# Altium PCB S6-EXP-Bridge.PcbDoc
Units mm, origin at the board's own origin, x right, y up, seen from the top; angles counter-clockwise.
Board outline 18 x 43 mm, 2 copper layers (Top Layer, Bottom Layer), stack 1.621 mm thick; 4 components, 19 nets, 40 pads, 43 vias.
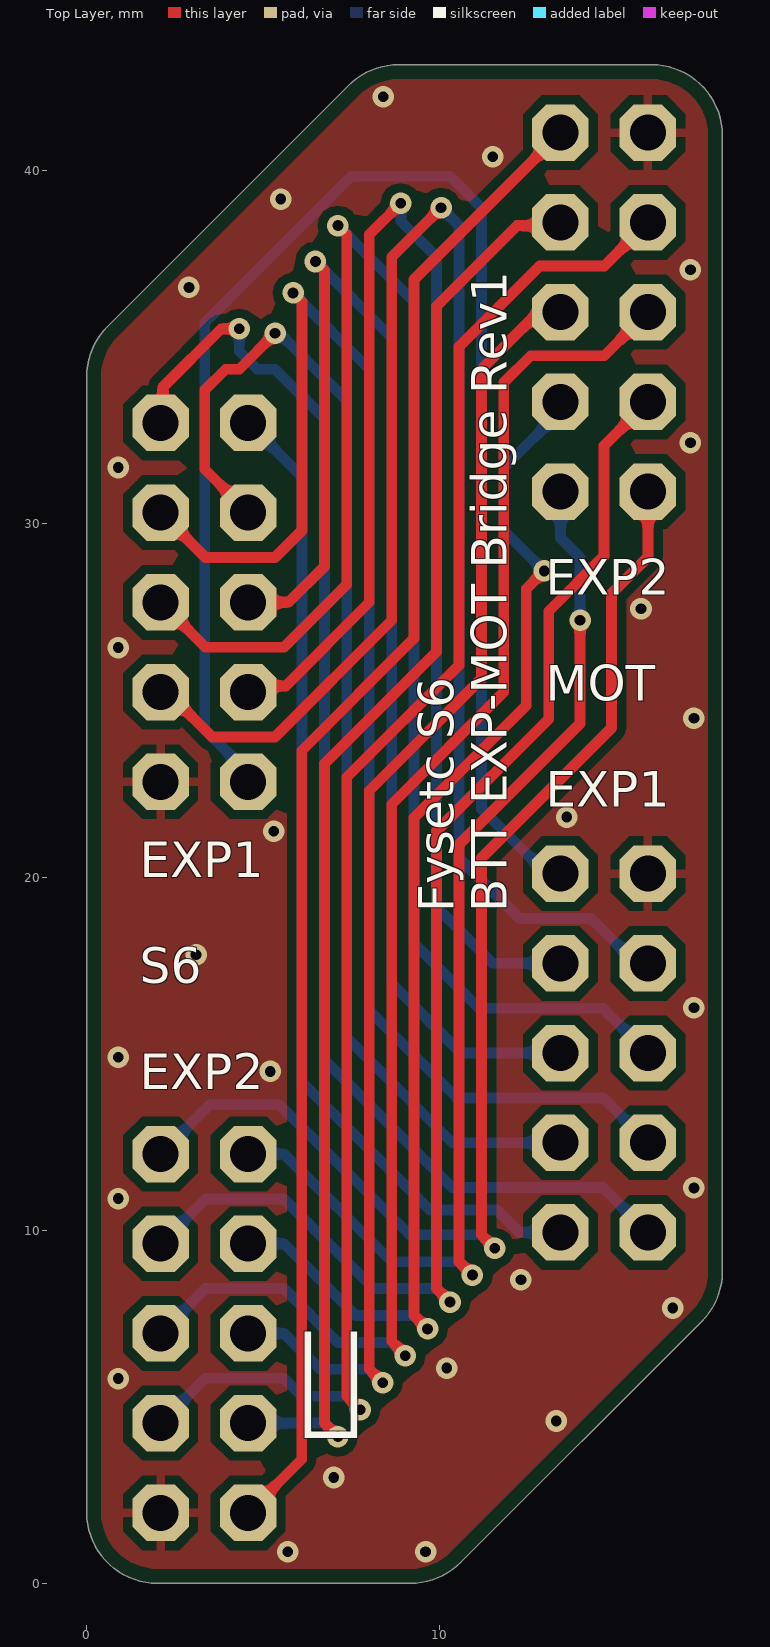
[diagram p0: Top Layer view]
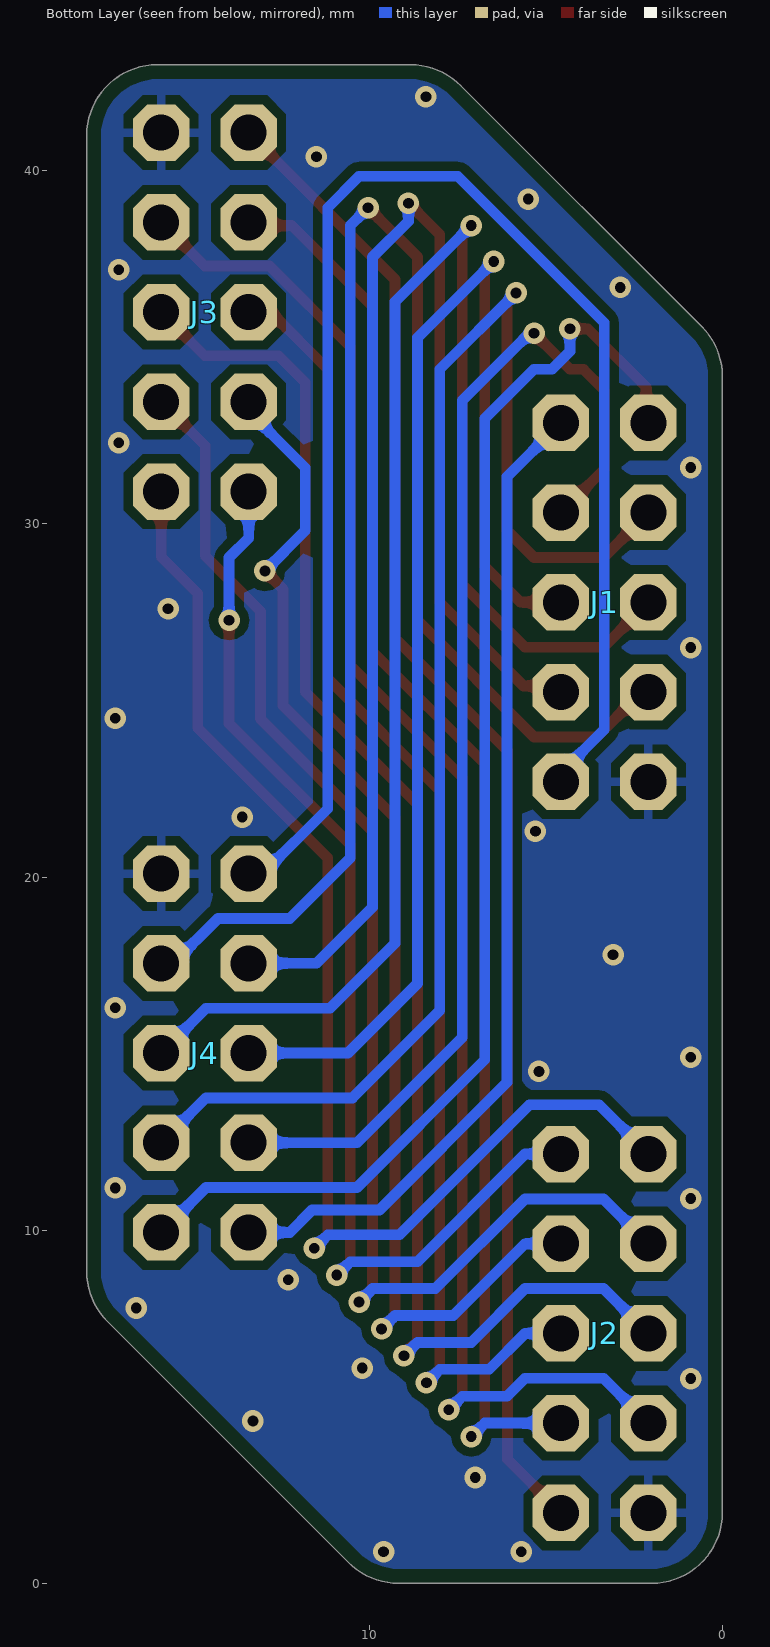
[diagram p1: Bottom Layer view, seen from below]
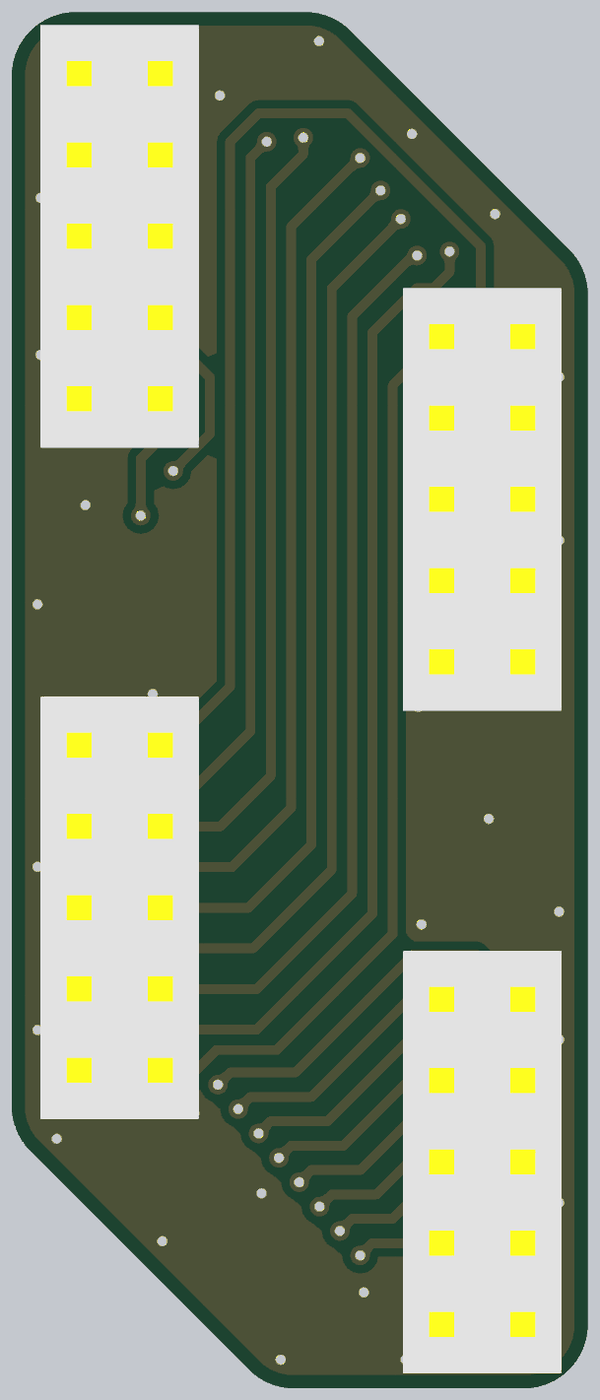
[diagram p2: 3D render of the assembled board from below, using the file's embedded part models]

## Layer stack, top to bottom
Top Solder: solder mask 0.0102, Solder Resist, Dk 3.5
Top Layer: signal copper 0.0356
Dielectric 1: dielectric 1.55, FR-4, Dk 4.8
Bottom Layer: signal copper 0.0356
Bottom Solder: solder mask 0.0102, Solder Resist, Dk 3.5

## Board outline
0.005,2.005 0.005,34.177 cw(c2.005,34.177) 0.591,35.591 7.419,42.419 cw(c8.833,41.005) 8.833,43.005 16.005,43.005 cw(c16.005,41.005) 18.005,41.005 18.005,8.833 cw(c16.005,8.833) 17.419,7.419 10.591,0.591 cw(c9.177,2.005) 9.177,0.005 2.005,0.005 cw(c2.005,2.005)

## Design rules (kind name [scope] priority, off if disabled: settings)
BoardOutlineClearance [All] p1: gap=0.406 ignorepadtopadclearanceinfootprint=FALSE except(0: Text-OutlineEdge)
Clearance Clearance_FiducialMark [(InComponentClass('FiducialMark')) and IsKeepOut vs (InComponentClass('FiducialMark'))] p1: gap=0.254 ignorepadtopadclearanceinfootprint=FALSE except(0: Arc-SMDPad Track-SMDPad)
Clearance [All] p2: gap=0.254 ignorepadtopadclearanceinfootprint=FALSE
HoleSize [All] p1: absolutevalues=TRUE maxlimit=6 minlimit=0.305 maxpercent=80.000 minpercent=20.000
MinimumAnnularRing [All] p1: minimumring=0.152
MinimumSolderMaskSliver [All] p1: minsoldermaskwidth=0.198
PolygonConnect [All] p1: thpad.connectstyle=Relief thpad.reliefconductorwidth=0.254 thpad.reliefentries=4 thpad.polygonreliefangle="90 Angle" thpad.airgapwidth=0.254 smdpad.connectstyle=Relief smdpad.reliefconductorwidth=0.254 smdpad.reliefentries=4 smdpad.polygonreliefangle="90 Angle" smdpad.airgapwidth=0.254 via.connectstyle=Direct via.reliefconductorwidth=0.254 via.reliefentries=4 via.polygonreliefangle="90 Angle" via.airgapwidth=0.254
RoomDefinition S6-EXP-Bridge [InComponentClass('S6-EXP-Bridge')] p1: confinementstyle=ConfineIn formatcopy=TRUE lockcomponents=FALSE outline 0,43 0,0 18,0 18,43
RoutingVias [All] p1: holewidth=0.711 width=1.27 viastyle="Through Hole" minholewidth=0.711 minwidth=1.27 maxholewidth=0.711 maxwidth=1.27
SilkToSolderMaskClearance [IsPad] p1: minsilkscreentomaskgap=0 clearancetoexposedcopper=TRUE
SolderMaskExpansion [All] p1: expansion=0.051
Width [All] p1: maxlimit=1.016 minlimit=0.305 preferedwidth=0.305 minimp=50.000000 maximp=50.000000 favimp=50.000000
27 further rules are at their usual default settings.

## Components (designator, comment, footprint, x,y, rotation, side; value= is the part's Value field where it differs from the comment)
J1 "SFH11-PBPC-D05-ST-BK" R2X5 3.307,27.781 r270 bottom
J2 "SFH11-PBPC-D05-ST-BK" R2X5 3.307,7.08 r270 bottom
J3 "SFH11-PBPC-D05-ST-BK" R2X5 14.627,36 r270 bottom
J4 "SFH11-PBPC-D05-ST-BK" R2X5 14.627,15.02 r270 bottom

## Footprints (in the part's own frame and the unit in brackets; to place one, negate y for a bottom-side part, rotate by r counter-clockwise, add the part's x,y. Pads: shape width x height; smd on the part's side, far side on the other; paste and mask are expansions set on the pad)
R2X5 [mm] "2x5 2.54mm Pin Receptacle"
  oct 1.6x1.6 hole 1.02: 1(5.08,-1.27) 2(5.08,1.207) 3(2.54,-1.27) 4(2.54,1.207) 5(0,-1.27) 6(0,1.207) 7(-2.54,-1.27) 8(-2.54,1.207) 9(-5.08,-1.27) 10(-5.08,1.207)
  body extent -6.6,-2.48 6.6,2.48, height 8.51

## Part data
J1 J2 J3 J4: library part R100_2x5, "2x5 2.54mm Pin Receptacle", Color=Black, Manufacturer 1=Sullins, Package Quantity=1, Supplier Part Number 1=S9194-ND, ComponentLink1Description=https://datasheet.ciiva.com/754/sfh11-pxxc-dxx-st-xx11160-c-754555.pdf?src-supplier=Digi-Key, ComponentLink1URL=https://datasheet.ciiva.com/754/sfh11-pxxc-dxx-st-xx11160-c-754555.pdf?src-supplier=Digi-Key, Connector Type=Header,Socket, Contact Plating=Gold, Lead Free="Lead Free", Manufacturer Part Number 1=SFH11-PBPC-D05-ST-BK, Mount="Through Hole", Number of Positions=10, Number of Rows=2, Packaging=Tray, Pitch=0.1inch, Pricing 1="1=0.66000, 10=0.57600, 100=0.49700, 500=0.40662, 1000=0.36144, 5000=0.32630 (USD)", RoHS=Yes, Row Spacing=0.1inch, Stock 1=22341, Supplier 1=Digi-Key, Termination=Solder

## Via types
v1: diameter 0.61, hole 0.305, Top Layer to Bottom Layer, tented both sides, 43 vias

## Nets (pads, with @x,y where several pads share a name; then routed paths per layer and width w, separated by ;. In a path a pad name is that pad's centre, name@x,y a point inside that pad or via, vN(x,y) a via of type N, cw(c..) or ccw(c..) an arc to the next point about the centre after c; other vN are vias at no path point)
E1-1: J1.1 J4.10 | length 43.8
  Top Layer w0.305: J1.1@4.577,22.32 J1.1 ; J4.10@13.406,20.1 J4.10
  Bottom Layer w0.305: J1.1 4.577,22.955 3.35,24.182 3.35,35.698 7.498,39.846 10.292,39.846 11.181,38.957 11.181,21.939 13.02,20.1 J4.10
E1-3: J1.3 J4.8 | length 40.7
  Top Layer w0.305: J1.3 4.751,25.415 5.64,25.415 8.006,27.781 8.006,38.195 v1(8.895,39.084)
  Bottom Layer w0.305: v1(8.895,39.084) 8.895,38.576 9.911,37.56 9.911,19.145 11.496,17.56 J4.8
E1-4: J1.4 J4.7 | length 45.9
  Top Layer w0.305: J1.4 2.291,25.241 3.561,23.971 5.339,23.971 8.641,27.273 8.641,37.56 v1(10.038,38.957)
  Bottom Layer w0.305: v1(10.038,38.957) 10.546,38.449 10.546,20.542 12.258,18.83 14.29,18.83 15.56,17.56 J4.7
E1-5: J1.5 J4.6 | length 38.3
  Top Layer w0.305: J1.5 5.72,27.781 6.736,28.797 6.736,37.179 v1(6.482,37.433)
  Bottom Layer w0.305: v1(6.482,37.433) 8.641,35.274 8.641,16.986 10.607,15.02 J4.6
E1-6: J1.6 J4.5 | length 45.9
  Top Layer w0.305: J1.6 3.37,26.511 5.593,26.511 7.371,28.289 7.371,38.195 v1(7.117,38.449)
  Bottom Layer w0.305: v1(7.117,38.449) 9.276,36.29 9.276,18.129 11.115,16.29 14.627,16.29 J4.5
E1-7: J1.7 J4.4 | length 34.8
  Top Layer w0.305: J1.7 3.35,31.548 3.35,33.793 3.942,34.385 4.323,34.385 v1(5.339,35.401)
  Bottom Layer w0.305: v1(5.339,35.401) 5.466,35.401 7.371,33.496 7.371,15.462 10.353,12.48 J4.4
E1-8: J1.8 J4.3 | length 42.3
  Top Layer w0.305: J1.8 3.37,29.051 5.339,29.051 6.101,29.813 6.101,36.29 v1(5.847,36.544)
  Bottom Layer w0.305: v1(5.847,36.544) 8.006,34.385 8.006,16.224 10.48,13.75 14.627,13.75 J4.3
E1-9: J1.9 J4.2 | length 28.4
  Bottom Layer w0.305: J1.9 6.101,31.337 6.101,14.192 9.718,10.575 11.623,10.575 12.258,9.94 J4.2
E1-10: J1.10 J4.1 | length 37.3
  Top Layer w0.305: J1.10 2.164,32.925 2.164,33.877 3.815,35.528 v1(4.323,35.528)
  Bottom Layer w0.305: J1.10 J1.10@2.291,32.861 ; v1(4.323,35.528) 4.323,34.893 4.831,34.385 5.339,34.385 6.736,32.988 6.736,14.827 10.353,11.21 14.627,11.21 J4.1
E2-1: J2.1 J3.10 | length 42.7
  Top Layer w0.305: J2.1 6.093,3.516 6.093,23.582 9.276,26.765 9.276,36.925 13.42,41.069 J3.10
E2-3: J2.3 J3.8 | length 40.5
  Top Layer w0.305: v1(7.117,4.159) 6.736,4.54 6.736,23.209 9.911,26.384 9.911,36.163 12.197,38.449 13.329,38.449 J3.8
  Bottom Layer w0.305: J2.3 6.736,4.54 v1@6.99,4.286
E2-4: J2.4 J3.7 | length 44.7
  Top Layer w0.305: v1(7.752,4.921) 7.371,5.302 7.371,22.828 10.546,26.003 10.546,35.02 12.832,37.306 14.663,37.306 J3.7
  Bottom Layer w0.305: J2.4 3.37,5.81 5.593,5.81 6.101,5.302 7.371,5.302 v1@7.625,5.048
E2-5: J2.5 J3.6 | length 37.3
  Top Layer w0.305: v1(8.387,5.683) 8.006,6.064 8.006,22.447 11.181,25.622 11.181,34.385 12.796,36 J3.6
  Bottom Layer w0.305: J2.5 5.593,7.08 6.609,6.064 8.006,6.064 v1@8.26,5.81
E2-6: J2.6 J3.5 | length 41.9
  Top Layer w0.305: v1@9,6.5 8.641,6.859 8.641,22.066 11.816,25.241 11.816,34.004 12.578,34.766 14.663,34.766 J3.5
  Bottom Layer w0.305: J2.6 3.37,8.35 5.593,8.35 7.117,6.826 8.641,6.826 v1@8.895,6.572
  other v1: 9.022,6.445
E2-7: J2.7 J3.4 | length 34.9
  Top Layer w0.305: v1(9.657,7.207) 9.276,7.588 9.276,21.685 12.451,24.86 12.451,28.162 v1@12.895,28.606
  Bottom Layer w0.305: J2.7 5.593,9.62 7.625,7.588 9.276,7.588 v1@9.53,7.334 ; v1(12.959,28.67) 11.816,29.813 11.816,31.591 13.42,33.195 J3.4
E2-8: J2.8 J3.3 | length 37.9
  Top Layer w0.305: v1(10.292,7.969) 9.911,8.35 9.911,21.304 13.086,24.479 13.086,27.527 14.65,29.091 14.65,32.213 J3.3
  Bottom Layer w0.305: J2.8 3.37,10.89 5.593,10.89 8.133,8.35 9.911,8.35 v1@10.165,8.096
E2-9: J2.9 J3.2 | length 31.7
  Top Layer w0.305: v1(10.927,8.731) 10.546,9.112 10.546,20.923 13.975,24.352 v1(13.975,27.273)
  Bottom Layer w0.305: J2.9 5.593,12.16 8.641,9.112 10.546,9.112 v1@10.8,8.858 ; J3.2 13.42,29.606 13.975,29.051 v1(13.975,27.273) v1@13.975,27.146
E2-10: J2.10 J3.1 | length 35.1
  Top Layer w0.305: v1(11.562,9.493) 11.181,9.874 11.181,20.542 14.864,24.225 14.864,28.035 15.897,29.068 J3.1
  Bottom Layer w0.305: J2.10 3.497,13.557 5.466,13.557 9.149,9.874 11.181,9.874 v1@11.435,9.62
GND: J1.2 J2.2 J3.9 J4.9
  other v1: 5.7,0.9 9.6,0.9 7,3 13.3,4.6 0.9,5.8 10.2,6.1 16.6,7.8 12.3,8.6 0.9,10.9 17.2,11.2 5.2,14.5 0.9,14.9 17.2,16.3 3.1,17.8 5.3,21.3 13.6,21.7 17.2,24.5 0.9,26.5 15.7,27.6 0.9,31.6 17.1,32.3 2.9,36.7 17.1,37.2 5.5,39.2 11.5,40.4 8.4,42.1

## Polygon pours and split planes (outlines as drawn)
GND on Top Layer "Top Layer-GND" (solid, remove dead copper, pour order 6): -1.138,-1.837 -1.138,44.545 19.182,44.545 19.182,-1.837
GND on Bottom Layer "Bottom Layer-GND" (solid, remove dead copper, pour order 8): -1.138,-1.905 -1.138,44.545 19.182,44.545 19.182,-1.905

## Silkscreen, mask and mechanical layers (free items; w line width, h text height)
Top Overlay:
  text "EXP2" at 13,28 h1
  text "MOT" at 13,25 h1
  text "EXP1" at 13,22 h1
  text "EXP1" at 1.5,20 h1
  text "Fysetc S6 / BTT EXP-MOT Bridge Rev1" at 11.9,19 h1 r90
  text "S6" at 1.5,17 h1
  text "EXP2" at 1.5,14 h1
  text "" at 6,2.8 h7
Mechanical 1:
  the board outline again, w0.01